# EAGLE board esp32board (EAGLE 9.2.0)
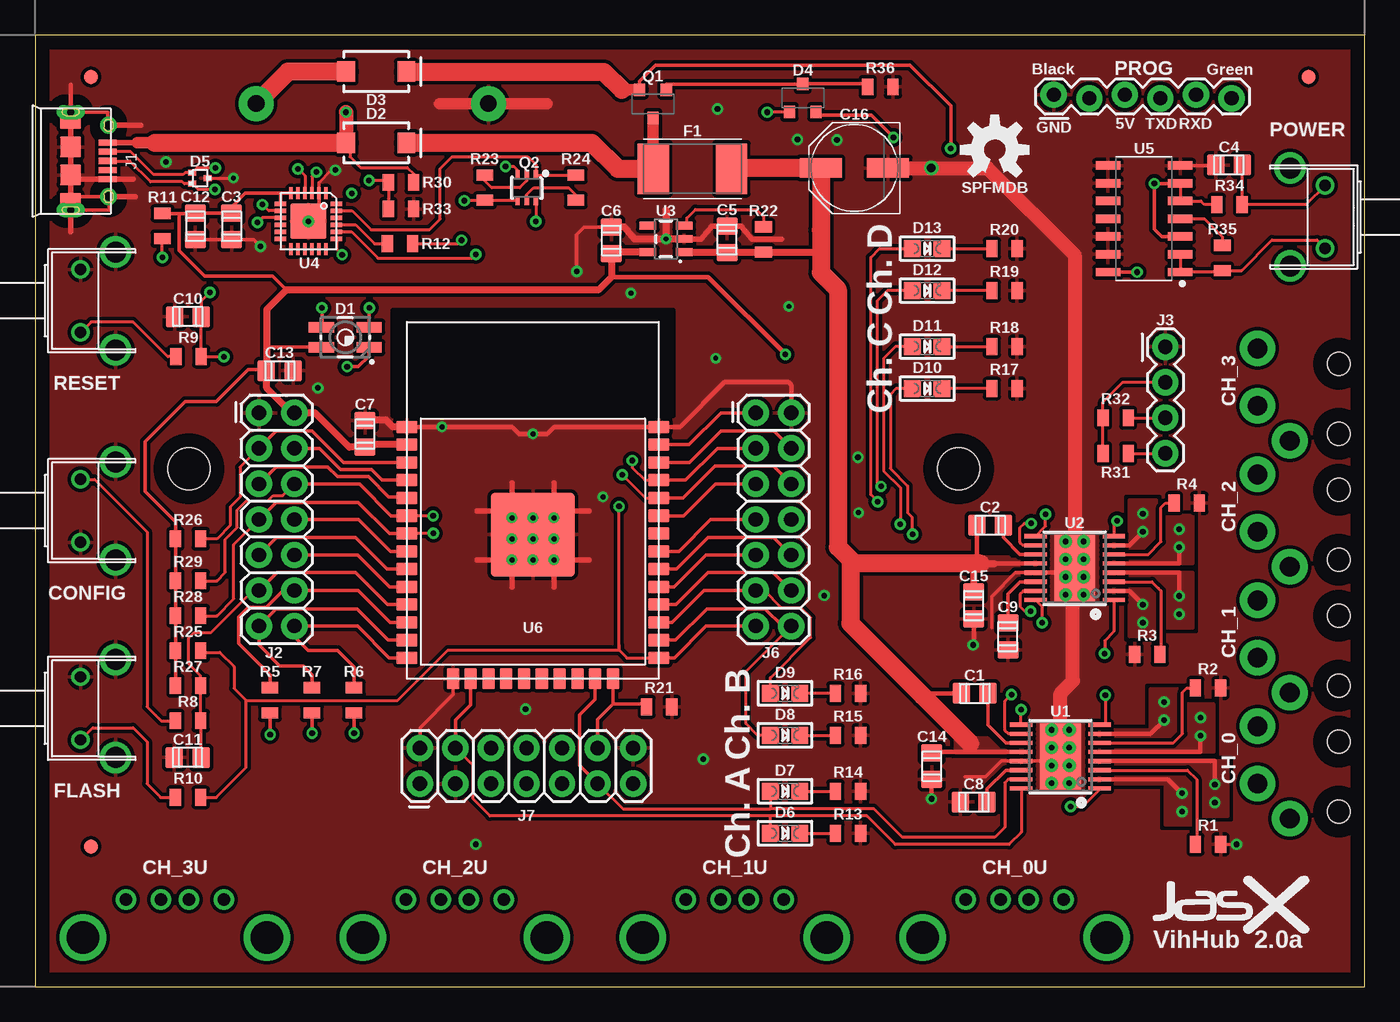
[diagram p0: board, top side]
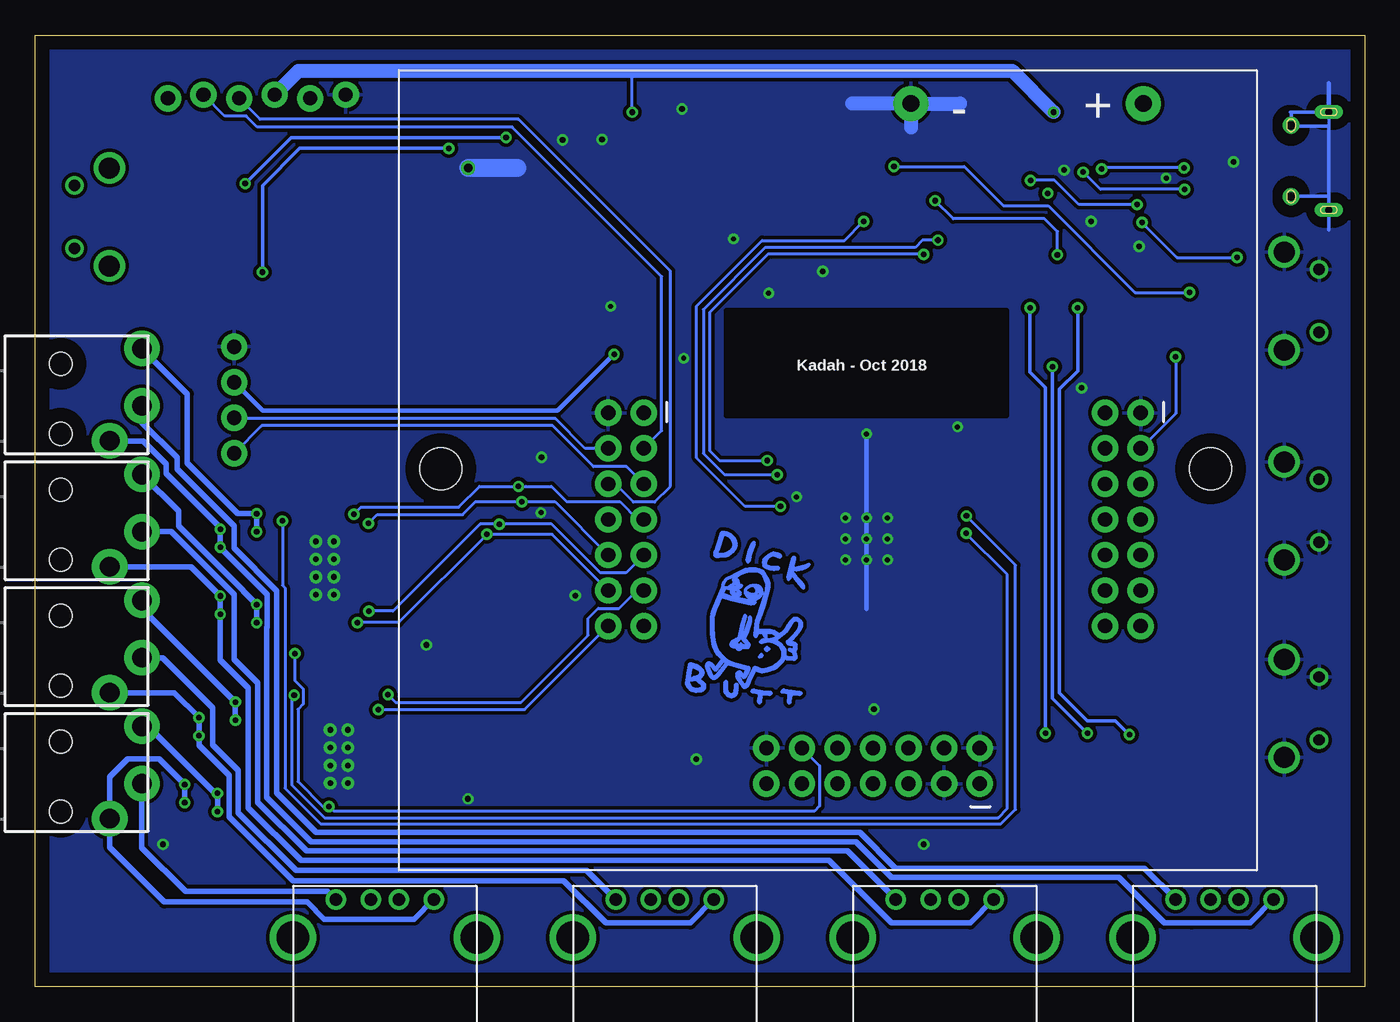
[diagram p1: board, bottom side, seen from below]

Size 95 x 68 mm. Coordinates in mm from the lower left corner, seen from the top.
Outline: 0,0 95,0 95,68 0,68 0,0
Copper layers (1*16): Top 0.035mm / dielectric 1.5mm / Bottom 0.035mm
Design rules "default *": minimum track width 6mil, minimum drill 0.35mm, track to track 10mil, track to pad 6mil, pad to pad 6mil, via to via 6mil, smd to smd 6mil, copper to edge 40mil, drill to drill 6mil, minimum pad ring 10mil, minimum via ring 8mil, stop-mask expansion 4mil, vias tented up to drill 0mil, thermal gap 10mil

## Footprints (pad centres in the part's own frame; a part is rotated, then mirrored left to right if it is on the bottom)
BC4AAPC = drill 1.2 pad 2.5: P$1 26.1,4.8; P$2 26.1,21.4 | hole 3: 0,0; 0,55
C0805 = smd 1.5 x 1.25: 1 0,0.95; 2 0,-0.95
PANASONIC_D = smd 3 x 1.4: + 2.4,0; - -2.4,0
MJ-2509N = drill 1.422 pad 2.54: 1 2.5,-2.3; 2 0,0; 3 -4.1,0 | hole 1.626: -3,-5.8; 2,-5.8
USB-A-H = drill 0.9 pad 1.45: D+ -2.718,1.003; D- -2.718,-1.003; GND -2.718,3.493; VBUS -2.718,-3.493 | drill 2.3: SHLD1 0,6.566; SHLD2 0,-6.566
SW6X6_RIGHT_SQ73 = drill 0.8: 1 -2.25,-1.25; 2 2.25,-1.25 | drill 1.5: SHLD@1 -3.5,1.25; SHLD@2 3.5,1.25
P-LCC-4-3 = smd 1.8 x 0.75: 1 -1.7,0.725; 2 -1.7,-0.725; 3 1.7,-0.725; 4 1.7,0.725
SMA-DIODE = smd 1.27 x 1.47: A -2.15,0; C 2.15,0
SOT91P240X110-3 = smd 0.9 x 0.8: 1 -1,0.95; 2 -1,-0.95; 3 1,0
SOT723 = smd 0.6 x 0.4: 1 -0.55,0.4; 2 -0.55,-0.4; 3 0.55,0
CHIPLED_0805 = smd 1.2 x 1.2: A 0,-1.05; C 0,1.05
FUSC7035X90 = smd 2.242 x 3.612: 1 -2.79,0; 2 2.79,0
FIDUCIAL-1X2 = smd 1 x 1: 1 0,0
USB-MICROB-10118194 = smd 1.3 x 0.4: D+ -2.5,0; D- -2.5,-0.65; GND -2.5,1.3; ID -2.5,0.65; VBUS -2.5,-1.3 | drill 0.6 pad 1.2: SHLD1 -2.55,2.55; SHLD2 -2.55,-2.55 | drill 0.5 pad 0.8 long: SHLD3 0.15,3.5; SHLD4 0.15,-3.5 | smd 1.5 x 1.1: SHLD5 0.15,2.85; SHLD6 0.15,-2.85 | smd 1.5 x 1.5: SHLD7 0.15,1; SHLD8 0.15,-1
2X7 = drill 1.016 pad 1.88: 1 0,0; 2 0,2.54; 3 2.54,0; 4 2.54,2.54; 5 5.08,0; 6 5.08,2.54; 7 7.62,0; 8 7.62,2.54; 9 10.16,0; 10 10.16,2.54; 11 12.7,0; 12 12.7,2.54; 13 15.24,0; 14 15.24,2.54
1X04 = drill 1.016 pad 1.88: 1 0,0; 2 2.54,0; 3 5.08,0; 4 7.62,0
1X06_LOCK = drill 1.016 pad 1.88: 1 0,0; 2 2.54,-0.254; 3 5.08,0; 4 7.62,-0.254; 5 10.16,0; 6 12.7,-0.254
SC70-6 = smd 0.3 x 0.66: 1 -0.65,-0.92; 2 0,-0.92; 3 0.65,-0.92; 4 0.65,0.92; 5 0,0.92; 6 -0.65,0.92
0805 = smd 0.8 x 1.2: 1 -0.9,0; 2 0.9,0
HTSSOP16 = smd 0.3 x 1.6: P$1 -2.275,-2.8; P$2 -1.625,-2.8; P$3 -0.975,-2.8; P$4 -0.325,-2.8; P$5 0.325,-2.8; P$6 0.975,-2.8; P$7 1.625,-2.8; P$8 2.275,-2.8; P$9 2.275,2.8; P$10 1.625,2.8; P$11 0.975,2.8; P$12 0.325,2.8; P$13 -0.325,2.8; P$14 -0.975,2.8; P$15 -1.625,2.8; P$16 -2.275,2.8 | smd 4.8 x 2.921: P$17 0,0 | drill 0.4 pad 0.61: P$18 -1.905,-0.635; P$19 -1.905,0.635; P$20 1.905,0.635; P$21 1.905,-0.635 | drill 0.4 pad 0.813: P$22 -0.635,-0.635; P$23 0.635,-0.635; P$24 0.635,0.635; P$25 -0.635,0.635
SOT23-5 = smd 0.55 x 1.2: 1 -0.95,-1.3; 2 0,-1.3; 3 0.95,-1.3; 4 0.95,1.3; 5 -0.95,1.3
QFN24-PAD = smd 0.85 x 0.3: 1 -2,1.25; 2 -2,0.75; 3 -2,0.25; 4 -2,-0.25; 5 -2,-0.75; 6 -2,-1.25; 13 2,-1.25; 14 2,-0.75; 15 2,-0.25; 16 2,0.25; 17 2,0.75; 18 2,1.25 | smd 0.3 x 0.85: 7 -1.25,-2; 8 -0.75,-2; 9 -0.25,-2; 10 0.25,-2; 11 0.75,-2; 12 1.25,-2; 19 1.25,2; 20 0.75,2; 21 0.25,2; 22 -0.25,2; 23 -0.75,2; 24 -1.25,2 | smd 2.55 x 2.55: TP 0,0
SOIC127P600X175-14 = smd 1.746 x 0.6: 1 -2.585,3.81; 2 -2.585,2.54; 3 -2.585,1.27; 4 -2.585,0; 5 -2.585,-1.27; 6 -2.585,-2.54; 7 -2.585,-3.81; 8 2.585,-3.81; 9 2.585,-2.54; 10 2.585,-1.27; 11 2.585,0; 12 2.585,1.27; 13 2.585,2.54; 14 2.585,3.81
ESP-WROOM32 = smd 1.5 x 0.9: 1 -9,7; 2 -9,5.73; 3 -9,4.46; 4 -9,3.19; 5 -9,1.92; 6 -9,0.65; 7 -9,-0.62; 8 -9,-1.89; 9 -9,-3.16; 10 -9,-4.43; 11 -9,-5.7; 12 -9,-6.97; 13 -9,-8.24; 14 -9,-9.51; 25 9,-9.51; 26 9,-8.24; 27 9,-6.97; 28 9,-5.7; 29 9,-4.43; 30 9,-3.16; 31 9,-1.89; 32 9,-0.62; 33 9,0.65; 34 9,1.92; 35 9,3.19; 36 9,4.46; 37 9,5.73; 38 9,7 | smd 0.9 x 1.5: 15 -5.715,-11; 16 -4.445,-11; 17 -3.175,-11; 18 -1.905,-11; 19 -0.635,-11; 20 0.635,-11; 21 1.905,-11; 22 3.175,-11; 23 4.445,-11; 24 5.715,-11 | smd 6 x 6: TP 0,-0.7

## Placement (x,y rotation side)
BAT  BC4AAPCBC4AAPC  [BC4AAPC]  11,37 90 bottom
C1  0.01uF/16V  [C0805]  67.13,20.95 90 top
C2  0.01uF/16V  [C0805]  68.25,32.97 90 top
C3  0.1uF  [C0805]  14.04,54.32 0 top
C4  0.1uF  [C0805]  85.32,58.7 270 top
C5  1.0uF  [C0805]  49.45,53.4 180 top
C6  1.0uF  [C0805]  41.18,53.33 180 top
C7  1.0uF  [C0805]  23.59,39.49 180 top
C8  2.2uF/6.3V  [C0805]  67.08,13.18 90 top
C9  2.2uF/6.3V  [C0805]  69.52,25.02 180 top
C10  2.2uF/6.3V  [C0805]  10.93,47.87 270 top
C11  2.2uF/6.3V  [C0805]  10.91,16.36 270 top
C12  4.7uF  [C0805]  11.46,54.32 0 top
C13  10uF  [C0805]  17.48,44.02 90 top
C14  10uF  [C0805]  64.08,15.75 180 top
C15  10uF  [C0805]  67.08,27.23 180 top
C16  100uF/10V  [PANASONIC_D]  58.55,58.5 180 top
CH_0  MJ-2509N  [MJ-2509N]  87.36,14.5 270 bottom
CH_0U  USB-A-H  [USB-A-H]  70,3.5 270 bottom
CH_1  MJ-2509N  [MJ-2509N]  87.36,23.5 270 bottom
CH_1U  USB-A-H  [USB-A-H]  50,3.5 270 bottom
CH_2  MJ-2509N  [MJ-2509N]  87.36,32.5 270 bottom
CH_2U  USB-A-H  [USB-A-H]  30,3.5 270 bottom
CH_3  MJ-2509N  [MJ-2509N]  87.36,41.5 270 bottom
CH_3U  USB-A-H  [USB-A-H]  10,3.5 270 bottom
CONFIG  MOMENTARY-SWITCH-SPST-RIGHTSQ75  [SW6X6_RIGHT_SQ73]  4.5,34 270 top
D1  RGB  [P-LCC-4-3]  22.17,46.4 180 top
D2  3A/40V/500mV  [SMA-DIODE]  24.38,60.3 0 top
D3  3A/40V/500mV  [SMA-DIODE]  24.38,65.38 0 top
D4  BAS70-05SOT32  [SOT91P240X110-3]  54.86,63.5 90 top
D5  D_ESD5V3U2U-03F  [SOT723]  11.79,57.77 0 top
D6  Blue  [CHIPLED_0805]  53.6,10.96 270 top
D7  Blue  [CHIPLED_0805]  53.6,13.96 270 top
D8  Blue  [CHIPLED_0805]  53.6,17.96 270 top
D9  Blue  [CHIPLED_0805]  53.6,20.96 270 top
D10  Blue  [CHIPLED_0805]  63.76,42.74 270 top
D11  Blue  [CHIPLED_0805]  63.76,45.74 270 top
D12  Blue  [CHIPLED_0805]  63.76,49.74 270 top
D13  Blue  [CHIPLED_0805]  63.76,52.74 270 top
F1  16V/2.2A  [FUSC7035X90]  46.97,58.43 0 top
FD1  FIDUCIAL1X2  [FIDUCIAL-1X2]  4,65 0 top
FD2  FIDUCIAL1X2  [FIDUCIAL-1X2]  4,10 0 top
FD3  FIDUCIAL1X2  [FIDUCIAL-1X2]  91,65 0 top
FLASH  MOMENTARY-SWITCH-SPST-RIGHTSQ75  [SW6X6_RIGHT_SQ73]  4.5,19.87 270 top
J1  USB-MICROB-2  [USB-MICROB-10118194]  2.7,59 180 top
J2  [2X7]  16,41 270 top
J3  [1X04]  80.77,45.72 270 top
J6  [2X7]  51.5,41 270 top
J7  [2X7]  27.5,14.5 0 top
LOGO1  OSHW-LOGOM  [OSHW-LOGO-M]  68.58,59.8 0 top
LOGO2  JASX_LOGO_MID  [JASX_LOGO_M]  85.55,5.56 0 top
LOGO3  DICKBUTTCOPPER  [DICKBUTT_COPPER]  44.42,23.48 0 bottom
POWER  MOMENTARY-SWITCH-SPST-RIGHTSQ75  [SW6X6_RIGHT_SQ73]  90.93,55 90 top
PROG  1x8M  [1X06_LOCK]  72.8,63.73 0 top
Q1  MOSFET_PCH-DMG2305UX-13  [SOT91P240X110-3]  44.15,63.08 270 top
Q2  [SC70-6]  35.14,57.09 180 top
R1  0.39R  [0805]  83.82,10.16 180 top
R2  0.39R  [0805]  83.82,21.34 180 top
R3  0.39R  [0805]  79.48,23.72 0 top
R4  0.39R  [0805]  82.3,34.54 180 top
R5  22R  [0805]  16.79,20.45 90 top
R6  51R  [0805]  22.79,20.45 90 top
R7  220R  [0805]  19.79,20.45 90 top
R8  220R  [0805]  10.94,19 0 top
R9  220R  [0805]  10.97,45.02 0 top
R10  220R  [0805]  10.94,13.52 0 top
R11  1K  [0805]  9.11,54.35 90 top
R12  1K  [0805]  26.07,53.09 0 top
R13  1K  [0805]  58.1,10.96 180 top
R14  1K  [0805]  58.1,13.96 180 top
R15  1K  [0805]  58.1,17.96 180 top
R16  1K  [0805]  58.1,20.96 180 top
R17  1K  [0805]  69.27,42.74 180 top
R18  1K  [0805]  69.27,45.74 180 top
R19  1K  [0805]  69.27,49.74 180 top
R20  1K  [0805]  69.27,52.74 180 top
R21  10K  [0805]  44.6,19.99 0 top
R22  10K  [0805]  52.06,53.38 90 top
R23  10K  [0805]  32.14,57.09 90 top
R24  10K  [0805]  38.64,57.09 270 top
R25  10K  [0805]  10.94,24 180 top
R26  10K  [0805]  10.94,32 180 top
R27  10K  [0805]  10.94,21.5 180 top
R28  10K  [0805]  10.94,26.5 180 top
R29  10K  [0805]  10.94,29 180 top
R30  10K  [0805]  26.15,57.47 0 top
R31  10K  [0805]  77.22,38.1 180 top
R32  10K  [0805]  77.22,40.64 180 top
R33  15K  [0805]  26.15,55.57 180 top
R34  100K  [0805]  85.34,55.88 180 top
R35  100K  [0805]  84.84,52.07 270 top
R36  100K  [0805]  60.4,64.29 180 top
RESET  MOMENTARY-SWITCH-SPST-RIGHTSQ75  [SW6X6_RIGHT_SQ73]  4.5,49 270 top
U1  DRV8833C  [HTSSOP16]  73.27,16.43 90 top
U2  DRV8833C  [HTSSOP16]  74.29,29.9 90 top
U3  3.3V  [SOT23-5]  45.09,53.43 90 top
U4  CP2102N-QFN24  [QFN24-PAD]  19.54,54.69 270 top
U5  4093SO14  [SOIC127P600X175-14]  79.25,54.86 180 top
U6  ESP-WROOM32  [ESP-WROOM32]  35.58,32.99 0 top

## Library data of the parts
BAT C1-C16 CH_0 CH_0U CH_1 CH_1U CH_2 CH_2U CH_3 CH_3U CONFIG D4 D6-D13 F1 FD1-FD3 FLASH J2 J6 J7 LOGO1-LOGO3 POWER PROG Q1 R1-R36 RESET U1 U2 U4-U6 = vibhud
D1 = vibhud; PROD_ID: DIO-12986
D2 D3 = vibhud; PROD_ID: DIO-09886
D5 = vibhud; DIGIKEY: ESD5V3U2U-03F H6327DKR-ND
J1 = vibhud; DIGIKEY: 609-4618-6-ND
J3 = vibhud; PROD_ID: CONN-09696
Q2 = vibhud; PROD_ID: TRANS-13337
U3 = vibhud; PROD_ID: VREG-12457

## Nets
3.3V: C3.1 C6.1 C7.1 C12.1 C13.1 D1.4 J2.2 J3.2 R11.2 R25.2 R26.2 R27.2 R28.2 R29.2 R31.2 R32.2 U3.5 U4.5 U4.6 U4.7 U6.2
5V: C1.1 C2.1 C5.1 C14.2 C15.2 C16.+ F1.2 R22.1 U1.P$12 U2.P$12 U3.1
A_IN1: D6.A J7.4 U1.P$16 U6.16
A_IN2: D7.A J7.11 U1.P$15 U6.23
A_ISENSE0: R1.2 U1.P$3
A_ISENSE1: R3.2 U2.P$3
B_IN1: D8.A J6.14 U1.P$9 U6.26
B_IN2: D9.A J6.11 U1.P$10 U6.27
B_ISENSE0: R2.2 U1.P$6
B_ISENSE1: R4.2 U2.P$6
BAT_PWR: BAT.P$1 D3.A
C_IN1: D10.A J6.12 U2.P$16 U6.28
C_IN2: D11.A J6.9 U2.P$15 U6.29
CONFIG: C11.1 J2.11 R8.2 R27.1 U6.11
CP_RESET: R11.1 U4.9
CP_VBUS: R30.1 R33.2 U4.8
D+: D5.2 J1.D+ U4.3
D-: D5.1 J1.D- U4.4
D_IN1: D12.A J6.7 U2.P$9 U6.31
D_IN2: D13.A J6.10 U2.P$10 U6.30
DTR: Q2.1 R24.1 U4.23
EN: C10.1 J2.3 Q2.3 R9.2 R26.1 U6.3
EN_BASE: Q2.5 R24.2
FAULT1: J2.7 R28.1 U1.P$8 U6.7
FAULT2: J2.6 R29.1 U2.P$8 U6.6
GND: BAT.P$2 C3.2 C4.2 C5.2 C6.2 C7.2 C8.1 C9.1 C10.2 C11.2 C12.2 C13.2 C14.1 C15.1 C16.- CONFIG.2 CONFIG.SHLD@1 CONFIG.SHLD@2 D5.3 FLASH.1 FLASH.SHLD@1 FLASH.SHLD@2 J1.GND J1.SHLD1 J1.SHLD2 J1.SHLD3 J1.SHLD4 J1.SHLD5 J1.SHLD6 J1.SHLD7 J1.SHLD8 J2.1 J3.1 J6.2 J7.2 J7.3 J7.14 PROG.1 R1.1 R2.1 R3.1 R4.1 R13.1 R14.1 R15.1 R16.1 R17.1 R18.1 R19.1 R20.1 R21.2 R33.1 R36.1 RESET.1 RESET.SHLD@1 RESET.SHLD@2 U1.P$13 U1.P$17 U1.P$18 U1.P$19 U1.P$20 U1.P$21 U1.P$22 U1.P$23 U1.P$24 U1.P$25 U2.P$13 U2.P$17 U2.P$18 U2.P$19 U2.P$20 U2.P$21 U2.P$22 U2.P$23 U2.P$24 U2.P$25 U3.2 U4.2 U4.TP U5.7 U5.8 U5.9 U5.12 U5.13 U6.1 U6.15 U6.38 U6.TP
INPUT_PWR: D2.C F1.1 Q1.3
IO0: J6.13 Q2.6 R10.2 R25.1 U6.25
IO0_BASE: Q2.2 R23.2
IO23: J6.1 U6.37
IO25: J2.10 U6.10
IO32: J2.8 U6.8
IO33: J2.9 U6.9
LED_B: D1.3 R5.1
LED_G: D1.2 R6.1
LED_R: D1.1 R7.1
MOT_0N: CH_0.1 CH_0U.GND U1.P$4
MOT_0P: CH_0.3 U1.P$2
MOT_1N: CH_1.1 CH_1U.GND U1.P$5
MOT_1P: CH_1.3 U1.P$7
MOT_2N: CH_2.1 CH_2U.GND U2.P$4
MOT_2P: CH_2.3 U2.P$2
MOT_3N: CH_3.1 CH_3U.GND U2.P$5
MOT_3P: CH_3.3 U2.P$7
N$1: R22.2 U3.3
N$2: D6.C R13.2
N$3: D7.C R14.2
N$4: D8.C R15.2
N$5: D9.C R16.2
N$6: D10.C R17.2
N$7: D11.C R18.2
N$8: D12.C R19.2
N$9: D13.C R20.2
N$10: D3.C Q1.2 U5.14
N$11: POWER.1 R35.2 U5.1 U5.2
N$12: CONFIG.1 R8.1
N$13: D4.2 R34.2 U5.3 U5.5 U5.6
N$14: CH_3.2 CH_3U.VBUS
N$15: D4.3 Q1.1 R36.2
N$16: R35.1 U5.4
N$18: C4.1 POWER.2 R34.1
N$31: FLASH.2 R10.1
N$32: CH_0.2 CH_0U.VBUS
N$33: CH_1.2 CH_1U.VBUS
N$34: CH_2.2 CH_2U.VBUS
N$37: R9.1 RESET.2
NSLEEP: J7.12 R21.1 U1.P$1 U2.P$1 U6.24
RTS: Q2.4 R23.1 U4.19
RXD0: J6.6 PROG.4 R12.2 U6.34
SCL: J3.3 J6.4 R32.1 U6.36
SDA: J3.4 J6.5 R31.1 U6.33
SENSOR_VN: J2.5 U6.5
SENSOR_VP: J2.4 U6.4
SLED_B: J2.12 R5.2 U6.12
SLED_G: J2.14 R6.2 U6.14
SLED_R: J2.13 R7.2 U6.13
TXD0: J6.3 PROG.5 U4.20 U6.35
USB_RXD: R12.1 U4.21
V_USB: D2.A D4.1 J1.VBUS PROG.3 R30.2
VCP0: C1.2 U1.P$11
VCP1: C2.2 U2.P$11
VINT0: C8.2 U1.P$14
VINT1: C9.2 U2.P$14

## Tracks (layer width: path | path; a pad name or v marks a point on that pad's centre or on a via)
3.3V  (via drill 0.4)
  Top 0.203: U4.5 U4.6 | R31.2 R32.2 76.32,41.77 77.72,43.18 J3.2
  Top 0.254: 17.5,56.69 15.03,56.69 14.04,55.7 C3.1 C12.1 11.44,55.25 10.3,55.25 | 17.5,56.69 U4.6 | U4.7 17.54,56.65 17.5,56.69 | R11.2 10.3,55.25 | 10.3,55.25 10.3,52.6 12.12,50.77 16.99,50.77 17.99,49.77 | R27.2 R25.2 R28.2 R29.2 R26.2 10.04,33.21 7.87,35.37 7.87,38.94 10.75,41.81 12.95,41.81 15.22,44.08 16.57,44.08 | 16.57,45.7 20.44,45.7 D1.4
  Top 0.305: 41.18,50.7 48.1,50.7 v53.62,45.19
  Top 0.508: U3.5 41.28,52.48 C6.1 41.18,50.7 40.25,49.77 20.23,49.77 18.04,49.77 17.99,49.77 17.95,49.77 16.57,48.39 16.57,45.7 16.57,45.6 16.57,44.08 16.57,44.05 C13.1 16.53,42.8 18.33,41 J2.2 20,41 22.46,38.54 C7.1 23.77,38.72 U6.2
  Bottom 0.305: v53.62,45.19 57.66,41.15 78.74,41.15 J3.2
5V
  Top 0.305: 68.58,30.23 U2.P$12 | C2.1 67.3,30.23 67.31,30.23 | C1.1 63.63,20.95 63.44,20.77 | 66.83,17.37 66.83,16.99 67.06,16.76 | 67.06,16.76 U1.P$12 | C14.2 64.14,16.76 67.06,16.76
  Top 0.508: U3.1 49.42,52.48 C5.1 49.48,52.48 R22.1 56.07,52.48 56.15,52.55 | C15.2 67.08,29.95 67.06,29.97 67.31,30.23 | 67.56,30.23 68.58,30.23
  Top 1.27: 66.83,17.37 63.44,20.77 58.25,25.95 58.25,30.52 | 67.56,30.23 67.31,30.23 58.55,30.23 58.25,30.52 | 58.25,30.52 57.36,31.41 57.36,49.81 56.15,51.03 56.15,52.55 56.15,54.08 C16.+ 49.83,58.5 F1.2
  pour Top: 72.01,30.55 72.01,29.9 69.74,29.9 69.57,29.73 66.81,29.73 66.81,30.74 69.54,30.74 69.74,30.55
  pour Top: 71,16.85 71,16.74 69.02,16.74 65.8,16.74 65.8,17.73 68.07,17.73 68.95,16.85
A_IN1
  Top 0.203: U1.P$16 70.47,11.03 69.6,10.16 61.47,10.16 59.44,12.19 52.55,12.19 | D6.A 52.55,12.19 | J7.4 31.29,15.79 31.29,13.41 32.51,12.19 52.55,12.19
  Top 0.254: J7.4 30.04,19.04 31.14,20.14 U6.16
A_IN2
  Top 0.203: U1.P$15 69.55,14.81 69.29,14.55 69.29,11.38 68.58,10.67 61.98,10.67 59.94,12.7 52.55,12.7 | D7.A 52.55,12.71 52.55,12.7 | J7.11 42,12.7 52.55,12.7
  Top 0.254: U6.23 40.02,20.52 38.9,19.4 38.9,15.8 J7.11
A_ISENSE0
  Top 0.203: U1.P$3 82.35,15.46 83,14.81 83,10.24 R1.2
A_ISENSE1
  Top 0.203: U2.P$3 79.81,28.93 80.28,28.46 80.46,28.27 80.46,24.01 R3.2
B_IN1  (via drill 0.4)
  Top 0.203: v70.46,19.79 U1.P$9 | D8.A 51.64,17.96 50.8,18.8 50.8,22.52 J6.14
  Top 0.254: U6.26 45.75,24.75 48,27 52.16,27 53.41,25.76 J6.14
  Bottom 0.203: v70.46,19.79 60.01,19.79 J6.14
B_IN2  (via drill 0.4)
  Top 0.203: U1.P$10 69.57,18.06 69.32,18.31 69.32,20.4 v69.77,20.85 | D9.A 52.55,22.07 55.42,24.94 55.42,26.36 54.73,27.05 53.35,27.05 52.11,28.3 J6.11
  Top 0.254: U6.27 45.52,26.02 47.8,28.3 J6.11
  Bottom 0.203: v69.77,20.85 69.22,20.3 60.28,20.3 55.47,25.1 55.47,26.31 54.76,27.03 53.27,27.03 52,28.3 J6.11
B_ISENSE0
  Top 0.203: U1.P$6 81.33,17.41 81.75,17.82 81.98,18.06 81.98,21.02 82.3,21.34 R2.2
B_ISENSE1
  Top 0.203: U2.P$6 79.54,30.88 80.46,31.8 80.46,34.23 80.77,34.54 R4.2
BAT_PWR
  Top 1.27: D3.A 18.08,65.38 BAT.P$1
C_IN1  (via drill 0.4)
  Top 0.203: U2.P$16 71.96,27.15 v71.96,26.01 | D10.A 61.53,42.74 61.11,42.32 61.11,37.02 62.36,35.77 62.36,33.86 62.66,33.55 62.66,32.36 v62.71,32.31
  Top 0.254: J6.12 52.74,29.6 48.1,29.6 45.79,27.29 U6.28
  Bottom 0.203: v71.96,26.01 69.01,26.01 v62.71,32.31 58.05,32.31 J6.12
C_IN2  (via drill 0.4)
  Top 0.203: U2.P$15 70.62,28.27 70.38,28.04 70.38,27.15 70.71,26.82 v71.14,26.82 | D11.A 61.48,45.74 60.63,44.88 60.63,36.85 61.82,35.66 v61.82,33.05
  Top 0.254: U6.29 45.66,28.56 47.94,30.84 J6.9
  Bottom 0.203: J6.9 52.77,29.57 54.6,29.57 58.07,33.05 v61.82,33.05 63.2,33.05 69.42,26.82 v71.14,26.82
CONFIG
  Top 0.203: C11.1 11.86,18.98 R8.2 R27.1 11.84,22.2 11,23.04 11,24.92 11.38,25.3 12.57,25.3 15.57,28.3 J2.11
  Top 0.254: J2.11 17.3,29.6 22.9,29.6 25.21,27.29 U6.11
CP_RESET  (via drill 0.4)
  Top 0.203: U4.9 16.24,54.94 v15.9,54.6 | v9.1,52.1 9.1,53.44 R11.1
  Bottom 0.203: v15.9,54.6 13.4,52.1 v9.1,52.1
CP_VBUS  (via drill 0.4)
  Top 0.203: R33.2 25.25,56.27 R30.1 25.11,57.62 v23.87,57.62 | U4.8 16.7,55.44 v16.26,55.88
  Bottom 0.203: v16.26,55.88 20.41,55.88 22.15,57.62 v23.87,57.62
D+  (via drill 0.4)
  Top 0.203: J1.D+ 6.77,59 8.25,57.52 10.52,57.52 10.66,57.37 D5.2 11.64,56.97 v12.85,56.97 | v20.1,58.2 19.79,57.89 U4.3
  Bottom 0.203: v12.85,56.97 18.87,56.97 v20.1,58.2
D-  (via drill 0.4)
  Top 0.203: J1.D- 6.85,59.65 8.48,58.02 10.58,58.02 10.74,58.17 D5.1 11.58,58.5 v12.89,58.5 | v18.8,58.42 19.29,57.93 U4.4
  Bottom 0.203: v12.89,58.5 18.71,58.5 v18.8,58.42
D_IN1  (via drill 0.4)
  Top 0.203: U2.P$9 72.21,32.9 v72.21,33.76 | D12.A 60.91,49.74 60.17,49 60.17,36.02 v60.45,35.74
  Top 0.254: J6.7 48.28,33.38 46,31.1 U6.31
  Bottom 0.203: v72.21,33.76 71.7,34.27 64.72,34.27 63.25,35.74 v60.45,35.74 59.94,35.74 58.1,35.74 57.01,34.65 53.2,34.65 51.93,33.38 J6.7
D_IN2  (via drill 0.4)
  Top 0.203: U2.P$10 70.61,31.52 70.38,31.75 70.38,32.79 70.69,33.1 v71.17,33.1 | D13.A 60.36,52.74 59.72,52.09 59.72,35.15 v60.22,34.65
  Top 0.254: J6.10 52.78,32.1 48.1,32.1 45.83,29.83 U6.30
  Bottom 0.203: J6.10 57.85,34.65 v60.22,34.65 63.52,34.65 64.44,33.73 70.54,33.73 v71.17,33.1
DTR
  Top 0.203: U4.23 22.65,55.44 24.02,54.07 28.18,54.07 28.96,54.85 28.96,58.46 29.8,59.3 35.22,59.3 35.79,58.74 Q2.1 35.81,57.99 R24.1
EN  (via drill 0.4)
  Top 0.203: R26.1 13,32 13.95,32.95 13.95,34.28 14.65,34.98 14.65,37.11 J2.3 | v13.5,45 13.48,45.02 R9.2 11.88,45.03 C10.1 11.88,48.98 v12.5,49.6 | Q2.3 34.49,58.34 34.22,58.6 v33.62,58.6
  Top 0.254: U6.3 22.05,37.45 19.82,39.68 17.22,39.68 J2.3
  Bottom 0.203: v13.5,45 13.5,40.96 J2.3 | v33.62,58.6 28.6,58.6 25.8,55.8 22.6,55.8 16.4,49.6 v12.5,49.6
EN_BASE
  Top 0.203: Q2.5 35.14,56.59 35.64,57.09 38.14,57.09 38.64,56.59 R24.2
FAULT1  (via drill 0.4)
  Top 0.203: R28.1 13,26.5 14.2,27.7 14.2,31.58 J2.7 | v76.48,20.83 v76.48,20.82 76.48,18.71 U1.P$8 | v28.47,32.38 v28.46,32.37 26.42,32.37
  Top 0.254: J2.7 17.22,34.6 23.1,34.6 25.33,32.37 26.42,32.37 U6.7
  Bottom 0.203: v28.47,32.38 25.52,29.43 25.52,12.72 26.17,12.06 74.32,12.06 76.66,14.4 76.66,20.65 v76.48,20.83
FAULT2  (via drill 0.4)
  Top 0.203: R29.1 13,29 | 13,29 | 13,29 13.6,29.6 13.6,31.95 14.46,32.81 14.46,34.06 15.1,34.7 16.64,34.7 17.02,35.08 17.7,35.08 J2.6 | U2.P$8 77.09,33.04 v77.32,33.27 | v28.45,33.63 28.44,33.64 U6.6
  Top 0.254: U6.6 25.46,33.64 23.18,35.92 J2.6
  Bottom 0.203: v77.32,33.27 77.32,28.66 77.14,28.49 77.14,14.16 74.58,11.61 25.98,11.61 24.94,12.65 24.94,30.12 v28.45,33.63
GND  (via drill 0.35, 0.4, 0.6)
  Top 0.203: D5.3 v14.18,57.77 | J1.SHLD6 2.55,61.5 | R1.1 v85.85,10.16 | U4.2 20.29,57.46 21.17,58.34 v21.46,58.34
  Top 0.254: J1.SHLD3 5.3,55.5 5.3,55.52 5.3,56.4 J1.SHLD1 2.6,56.45 2.55,56.5 | J1.SHLD4 5.2,62.5 5.2,61.6 J1.SHLD2 5.2,61.5 | C12.2 C3.2 15.63,53.37 v16.1,52.9 | J7.2 27.5,18.5 29.86,20.86 U6.15 | 66.44,14.97 67.91,14.97 69.05,16.11 U1.P$13 72.94,16.11 U1.P$17 | U2.P$13 70.06,29.57 68.38,27.89 68.38,25.67 | C6.2 39.24,54.28 38.71,53.75 v38.71,51.1 | U4.2 20.29,55.44 | U5.7 84.34,58.67 C4.2
  Top 0.292: 20.29,55.44 U4.TP
  Top 0.305: U6.1 v29.08,39.99 34.08,39.99 34.58,39.49 v35.58,39.49 36.58,39.49 37.08,39.99 U6.38 46.09,39.99 49.28,43.18 53.85,43.18 54.04,42.99 J6.2 | J1.SHLD4 2.55,64.45 | U2.P$13 73.96,29.57 U2.P$17 | v64.06,13.41 64.06,14.77 C14.1 | C15.1 67.11,26.25 67.11,24.49 v67.03,24.41
  Top 0.406: U3.2 47.59,53.43 48.37,54.35 C5.2 50.45,54.35 51.25,53.4 53.33,53.4 | 7,57.7 J1.GND 2.85,57.7 J1.SHLD7 | J1.SHLD7 2.55,56.5 J1.SHLD5 2.55,53.95 | J1.SHLD7 J1.SHLD8 2.55,61.5 J1.SHLD4 | J1.SHLD2 7.55,61.55 | J1.SHLD1 7.15,56.45 | 31.58,33.99 33.08,33.99 | 33.78,30.49 31.58,30.49 | 38.08,30.49 39.58,30.49 | 34.08,35.99 34.08,34.99 | 37.08,35.99 37.08,34.99 | 39.58,33.99 38.08,33.99 | 34.08,28.55 34.08,29.49 | 37.08,28.55 37.08,29.49
  Top 0.508: U3.2 v45.09,53.43 | 45.09,55.51 v45.09,53.43 | v45.09,53.43 42.84,53.43 42.12,54.28 C6.2 | U6.1 25.58,39.99 25.08,40.49 23.64,40.49 C7.2
  Top 0.813: 36.6,63.1 BAT.P$2 28.9,63.1
  Top 1.016: U1.P$17 73.27,20.95 74.17,21.84 74.17,29.78 U2.P$17 74.29,52.27 68.06,58.5 C16.-
  Bottom 0.203: J1.SHLD4 2.55,61.5
  Bottom 0.254: 2.55,56.5 2.55,61.5 5.2,61.5 J1.SHLD2 5.25,62.45 5.3,62.5 5.25,62.5 J1.SHLD4 | 2.55,56.5 J1.SHLD3 2.55,54.05 | J1.SHLD1 5.2,56.5 2.55,56.5
  Bottom 0.305: 35.58,26.99 v35.58,31.99 v35.58,39.49 | J1.SHLD4 2.55,64.55
  Bottom 1.016: BAT.P$2 32.4,61.4 | BAT.P$2 36.6,63.1 | BAT.P$2 28.9,63.1
  Bottom 1.27: 60.55,58.5 v64.05,58.5
  other vias: 35.58,33.49 34.08,33.49 34.08,31.99 34.08,30.49 35.58,30.49 37.08,30.49 37.08,31.99 37.08,33.49 58.85,33.87 40.58,34.99 53.86,48.61 42.58,49.56 48.64,44.9 19.54,54.69 35.05,19.81 47.75,16.26 31.5,10.16 20.22,42.77 58.8,37.82 56.39,27.94 48.77,62.71 54.48,60.53 57.3,60.5 9.35,58.93
  pour Bottom (isolate 0.191, rank 6): -0.14,-0.64 -0.14,68.45 100.33,68.45 100.33,-0.64
  pour Top (isolate 0.191, rank 6): -0.77,-1.27 -0.77,69.09 100.97,69.09 100.97,-1.27
INPUT_PWR
  Top 0.813: Q1.3 44.16,58.46 F1.1
  Top 1.27: D2.C 39.78,60.3 41.64,58.43 F1.1
IO0  (via drill 0.4)
  Top 0.203: v35.79,54.69 Q2.6 | 15.09,20.45 25.92,20.45 29.52,24.04 41.73,24.04 | 41.73,24.04 41.73,24.38 | 41.73,24.38 v41.73,34.31 | R25.1 11.96,23.88 13.21,23.88 14.22,22.86 14.22,21.31 15.09,20.45 | 41.73,24.04 | 41.73,24.04 42.29,23.48 U6.25 | 41.73,24.38 41.73,24.04 | R10.2 12.96,13.52 15.09,15.65 15.09,20.45
  Top 0.254: U6.25 45.68,23.48 47.96,25.76 J6.13
  Bottom 0.203: v41.73,34.31 44.26,34.31 47.73,37.77 47.73,48.64 43.05,53.31 37.16,53.31 v35.79,54.69
IO0_BASE
  Top 0.203: Q2.2 35.14,57.59 34.64,57.09 32.64,57.09 32.14,57.59 R23.2
IO23
  Top 0.254: U6.37 46.72,38.72 49,41 J6.1
IO25
  Top 0.254: U6.10 25.34,28.56 23.06,30.84 J2.10
IO32
  Top 0.254: J2.8 23.12,33.38 25.4,31.1 U6.8
IO33
  Top 0.254: J2.9 17.26,32.1 22.9,32.1 25.17,29.83 U6.9
LED_B  (via drill 0.4)
  Top 0.254: D1.3 20.5,47.16 v20.5,48.5 | v16.8,18 R5.1
  Bottom 0.254: v20.5,48.5 20.5,44 21.79,42.71 21.79,21 19.79,19 17.8,19 v16.8,18
LED_G  (via drill 0.4)
  Top 0.254: D1.2 23.87,48.47 v23.9,48.5 | v22.8,18.1 v22.79,18.11 R6.1
  Bottom 0.254: v23.9,48.5 23.9,43.9 22.81,42.81 22.81,20.39 22.8,20.38 v22.8,18.1
LED_R  (via drill 0.4)
  Top 0.254: D1.1 23.87,45.07 23.1,44.3 v22.3,44.3 | R7.1 v19.8,18.1
  Bottom 0.254: v22.3,44.3 22.3,20.6 v19.8,18.1
MOT_0N  (via drill 0.4)
  Top 0.305: U1.P$4 84.3,16.11 84.3,14.73
  Top 0.406: 84.3,14.73 v84.3,14.44
  Bottom 0.406: v84.3,13.14 v84.3,14.44 86.11,16.26 88.39,16.26 89.66,14.99 CH_0.1 89.66,9.95 85.76,6.05 75.56,6.05 74.34,4.82 67.9,4.82 CH_0U.GND
  pour Top (isolate 0.254): 75.55,16.11 75.55,15.78 82.68,15.78 83.33,15.13 83.33,12.17 85.28,12.17 85.28,16.11 84.3,16.11
MOT_0P  (via drill 0.4)
  Top 0.305: U1.P$2 80.95,14.81 v81.95,13.81
  Bottom 0.406: v81.95,12.51 v81.95,13.81 82.14,13.81 86.93,18.6 CH_0.3
  pour Top (isolate 0.254): 75.55,15.13 75.55,14.48 80.73,14.48 80.73,11.56 82.68,11.56 82.68,14.16 82.68,14.48 82.03,15.13
MOT_1N  (via drill 0.4)
  Top 0.305: U1.P$5 83.28,16.76 v83.28,17.92
  Bottom 0.406: CH_1U.GND 48.17,4.55 54.19,4.55 57.22,7.57 76.56,7.57 81.13,12.14 81.13,15.09 83.28,17.25 v83.28,17.92 v83.28,19.22 85.07,21 CH_1.1
  pour Top (isolate 0.254): 75.55,17.08 75.55,16.76 82.64,16.76 84.26,16.76 84.26,20.19 82.31,20.19 82.31,18.24 81.15,17.08
MOT_1P  (via drill 0.4)
  Top 0.305: U1.P$7 79.71,18.06 v80.69,19.03
  Bottom 0.406: v80.69,19.03 v80.69,20.33 87.36,27.01 CH_1.3
  pour Top (isolate 0.254): 75.55,17.73 75.55,18.38 79.71,18.38 79.71,21.31 81.66,21.31 81.66,18.38 81.01,17.73
MOT_2N  (via drill 0.4)
  Top 0.305: U2.P$4 81.76,29.57 v81.76,27.91
  Bottom 0.406: CH_2U.GND 28.18,4.55 33.8,4.55 38.27,9.02 75.99,9.02 79.76,12.78 79.76,21.34 81.76,23.34 v81.76,26.61 v81.76,27.91 83.85,30 CH_2.1
  pour Top (isolate 0.254): 76.56,29.57 82.74,29.57 82.74,25.63 80.79,25.63 80.79,28.6 80.14,29.25 76.56,29.25
MOT_2P  (via drill 0.4)
  Top 0.305: U2.P$2 78.19,28.27 v79.16,27.3
  Bottom 0.406: CH_2.3 84.73,33.97 84.73,32.91 80.11,28.29 80.11,28.25 v79.16,27.3 v79.16,26
  pour Top (isolate 0.254): 76.56,28.6 76.56,27.95 78.19,27.95 78.19,25.02 80.14,25.02 80.14,28.27 79.81,28.6
MOT_3N  (via drill 0.4)
  Top 0.305: U2.P$5 81.76,30.23 v81.76,31.38
  Bottom 0.406: CH_3U.GND 8.18,4.55 12.35,4.55 14.3,4.55 16.25,6.5 17.55,7.8 33.15,7.8 33.8,7.8 36.34,10.34 75.27,10.34 78.44,13.5 78.44,25.65 78.4,25.69 78.4,28.02 v81.76,31.38 v81.76,32.68 81.76,32.81 85.61,36.66 85.61,37.35 87.26,39 CH_3.1
  pour Top (isolate 0.254): 76.56,30.55 79.3,30.55 80.79,32.03 80.79,33.66 82.74,33.66 82.74,30.23 79.97,30.23 76.56,30.23
MOT_3P  (via drill 0.4)
  Top 0.305: U2.P$7 78.19,31.52 v79.16,32.5
  Bottom 0.406: CH_3.3 84.11,42.35 84.11,37.41 80.51,33.8 v79.16,33.8 v79.16,32.5
  pour Top (isolate 0.254): 76.56,31.85 76.56,31.2 79.13,31.2 80.14,32.21 80.14,34.77 78.19,34.77 78.19,32.83 78.19,31.85
N$1
  Top 0.203: U3.3 46.59,54.58 46.59,54.93 47.19,55.53 51.54,55.53 52.06,55.02 R22.2
N$2
  Top 0.203: D6.C R13.2
N$3
  Top 0.203: D7.C R14.2
N$4
  Top 0.203: D8.C R15.2
N$5
  Top 0.203: R16.2 D9.C
N$6
  Top 0.203: R17.2 D10.C
N$7
  Top 0.203: D11.C R18.2
N$8
  Top 0.203: R19.2 D12.C
N$9
  Top 0.203: D13.C R20.2
N$10  (via drill 0.4)
  Top 0.254: v78.74,51.05 U5.14 | Q1.2 43.2,64.69 44.35,65.84 62.53,65.84 65.43,62.94 v65.43,59.89
  Top 0.813: 41.94,64.08 Q1.2
  Top 1.27: D3.C 26.54,65.37 40.64,65.37 41.94,64.08
  Bottom 0.254: v78.74,51.05 78.74,57.23 76.08,59.89 v65.43,59.89
N$11
  Top 0.203: POWER.1 91.59,53.34 88.39,53.34 86.22,51.17 R35.2 84.72,51.05 U5.1 U5.2
N$12
  Top 0.203: CONFIG.1 4.25,36.25 8,32.5 8,20 9,19 R8.1
N$13  (via drill 0.4)
  Top 0.203: R34.2 83.57,55.88 83.31,56.13 U5.5 U5.6
  Top 0.254: v61.34,60.68 59.75,62.27 55.81,62.27 D4.2 | U5.6 81.81,57.38 v79.98,57.38 79.98,54.13 80.52,53.59 U5.3
  Bottom 0.254: v79.98,57.38 76.71,60.66 61.37,60.66 v61.34,60.68
N$14
  Bottom 0.406: CH_3U.VBUS 15.73,8.46 33.53,8.46 36.07,11 74.9,11 77.72,13.83 77.72,28.28 80.77,31.33 80.77,32.89 84.84,36.97 84.84,37.79 87.36,40.31 CH_3.2
N$15
  Top 0.254: Q1.1 45.11,64.08 45.11,64.5 D4.3 54.88,64.52 59.27,64.52 R36.2
N$16
  Top 0.203: U5.4 83.57,54.86 84.84,53.59 R35.1
N$17  (via drill 0.4)
  other vias: 22.63,56.69
N$18
  Top 0.203: POWER.2 90.81,55.88 R34.1 86.27,55.91 C4.1
N$31
  Top 0.203: FLASH.2 4.13,18.5 7,18.5 8,17.5 8,14.48 8.97,13.52 R10.1
N$32
  Bottom 0.406: CH_0.2 87.36,9.93 84.24,6.8 74.08,6.8 CH_0U.VBUS
N$33
  Bottom 0.406: CH_1.2 85.88,23.5 82.3,19.91 82.3,17.27 80.47,15.44 80.47,12.42 76.35,8.31 55.61,8.31 53.52,6.22 CH_1U.VBUS
N$34
  Bottom 0.406: CH_2U.VBUS 36.95,9.68 75.6,9.68 79.1,13.18 79.1,21.69 80.77,23.37 80.77,28.02 85.27,32.51 87.35,32.51 CH_2.2
N$37
  Top 0.203: R9.1 9.48,45.02 7,47.5 4,47.5 RESET.2
NSLEEP  (via drill 0.4)
  Top 0.203: U2.P$1 77.09,25.37 76.43,24.71 v76.43,23.8 | U1.P$1 76.07,14.07 74.85,12.85 v73.99,12.85
  Top 0.254: J7.12 40.2,19.1 41.3,20.2 | 41.3,20.2 U6.24 | R21.1 43.5,20.2 41.3,20.2
  Bottom 0.203: v76.43,23.8 76.43,21.86 75.82,21.25 75.82,20.19 76.2,19.81 76.2,14.64 74.41,12.85 v73.99,12.85 73.66,12.52 39.32,12.52 38.94,12.9 38.94,15.78 J7.12
RTS  (via drill 0.4)
  Top 0.203: Q2.4 34.47,56.19 R23.1 30.71,56.19 v30.68,56.16 | U4.19 21.54,52.71 v21.95,52.3
  Bottom 0.203: v21.95,52.3 21.95,53.95 22.86,54.86 29.39,54.86 v30.68,56.16
RXD0  (via drill 0.4)
  Top 0.203: R12.2 30.23,53.09 v30.48,53.34 | v41.96,36.58 43.62,34.91 U6.34
  Top 0.254: J6.6 52.76,37.2 48.6,37.2 46.31,34.91 U6.34
  Bottom 0.203: v41.96,36.58 45.72,36.58 47.24,38.1 47.24,48.39 42.82,52.81 32.11,52.81 31.57,53.34 v30.48,53.34 | J6.6 53.53,35.92 52.23,34.62 50.72,34.62 49.61,35.74 49.61,51.13 60.45,61.98 78.92,61.98 PROG.4
SCL
  Top 0.203: R32.1 J3.3
  Top 0.254: J6.4 52.8,39.7 49,39.7 46.75,37.45 U6.36
  Bottom 0.203: J3.3 80.72,40.59 57.82,40.59 55.69,38.46 J6.4
SDA
  Top 0.203: R31.1 J3.4
  Top 0.254: U6.33 46.34,33.64 48.62,35.92 J6.5
  Bottom 0.203: J6.5 52.74,37.16 55.09,37.16 58.01,40.08 78.79,40.08 J3.4
SENSOR_VN
  Top 0.254: U6.5 26.49,35 25.28,35 23.85,36.44 21.63,36.44 20.92,37.14 17.22,37.14 J2.5
SENSOR_VP
  Top 0.254: J2.4 20.32,38.46 21.84,36.94 24.06,36.94 24.82,36.18 U6.4
SLED_B
  Top 0.254: R5.2 16.79,22.28 14.55,24.51 14.55,26.39 15.24,27.08 16.5,27.08 17.72,28.3 J2.12 23.1,28.3 25.38,26.02 U6.12
SLED_G
  Top 0.254: U6.14 25.32,23.48 23.04,25.76 J2.14 18.54,25 19.53,24.01 21.61,24.01 22.79,22.83 R6.2
SLED_R
  Top 0.254: U6.13 25.25,24.75 23,27 17.24,27 J2.13 16,24.4 17.5,22.9 19.16,22.9 19.79,22.27 R7.2
TXD0  (via drill 0.4)
  Top 0.203: U4.20 22.62,53.94 24.51,52.05 31.22,52.05 v31.5,52.32 | U6.35 43.57,36.18 42.67,37.08 v42.67,37.59
  Top 0.254: U6.35 46.48,36.18 48.76,38.46 J6.3
  Bottom 0.203: v31.5,52.32 42.63,52.32 46.79,48.17 46.79,38.29 46.09,37.59 v42.67,37.59 | J6.3 50.23,39.73 50.23,50.74 60.91,61.42 79.12,61.42 79.91,62.2 81.43,62.2 PROG.5
USB_RXD
  Top 0.203: U4.21 22.91,54.44 24.26,53.09 R12.1
V_USB  (via drill 0.4)
  Top 0.203: D2.A 22.5,60.15 22.5,59.3 23.27,58.53 26.6,58.53 27.05,58.08 R30.2 | D4.1 53.83,62.48 v52.32,62.48
  Top 0.406: J1.VBUS 7.3,60.3
  Top 0.813: 7.3,60.3 8.58,60.3
  Top 1.016: v22.23,62.48 D2.A
  Top 1.27: 8.58,60.3 D2.A | D2.A
  Bottom 0.203: v52.32,62.48 52.32,65.43
  Bottom 1.016: PROG.3 76.17,65.43 52.32,65.43 50.8,65.43 25.17,65.43 v22.23,62.48
VCP0
  Top 0.254: U1.P$11 69.37,17.41 68.72,18.06 68.1,18.68 C1.2
VCP1
  Top 0.254: U2.P$11 70.39,30.88 69.18,32.08 C2.2
VINT0
  Top 0.254: U1.P$14 69.37,15.46 68.03,14.12 C8.2
VINT1
  Top 0.254: U2.P$14 70.39,28.93 69.52,28.06 C9.2

## Text on the board
tPlace: Black | Green | GND | 5V | TXD | RXD | SPFMDB | Ch. D | Ch. C | Ch. B | Ch. A | VihHub 2.0a
bPlace: Kadah - Oct 2018